# EAGLE board capacitor (EAGLE 9.6.2)
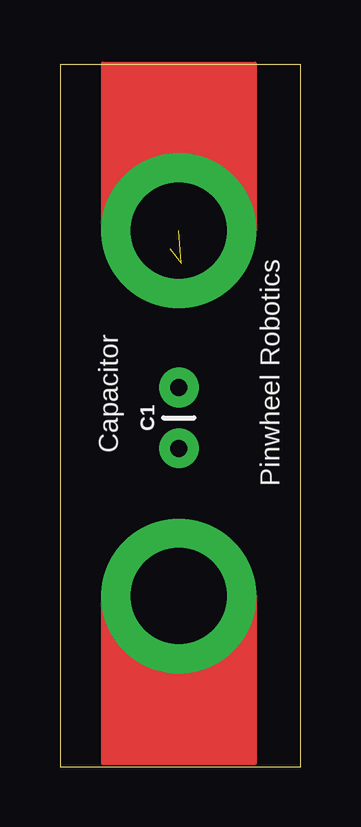
[diagram p0: board, top side]
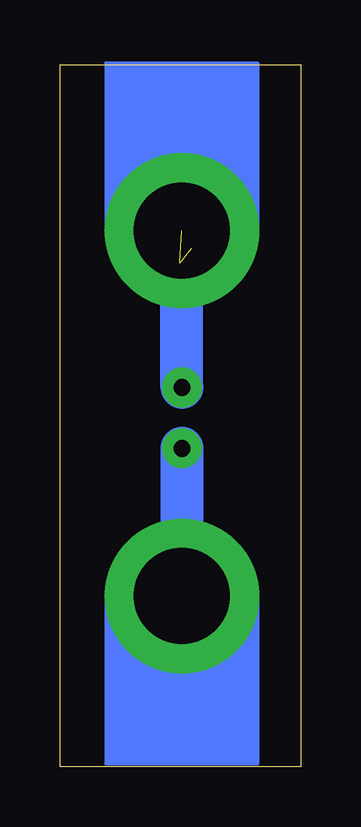
[diagram p1: board, bottom side, seen from below]

Size 10.03 x 29.27 mm. Coordinates in mm from the lower left corner, seen from the top.
Outline: 0,0 10.03,0 10.03,29.27 0,29.27 0,0
Copper layers (1*16): Top 0.035mm / dielectric 1.5mm / Bottom 0.035mm
Design rules "default": minimum track width 6mil, minimum drill 0.35mm, track to track 6mil, track to pad 6mil, pad to pad 6mil, via to via 6mil, smd to smd 6mil, copper to edge 40mil, drill to drill 6mil, minimum pad ring 10mil, minimum via ring 8mil, stop-mask expansion 4mil, vias tented up to drill 0mil, thermal gap 10mil

## Footprints (pad centres in the part's own frame; a part is rotated, then mirrored left to right if it is on the bottom)
CAP-PTH-2.54 = drill 0.7 pad 1.651: 1 -1.27,0; 2 1.27,0
MICROBIT_PAD = drill 4 pad 6.452: PAD 0,0

## Placement (x,y rotation side)
C1  22pF  [CAP-PTH-2.54]  4.95,14.54 90 top
U$1  MICROBIT_PAD  [MICROBIT_PAD]  4.95,22.35 180 top
U$2  MICROBIT_PAD  [MICROBIT_PAD]  4.95,7.11 0 top

## Library data of the parts
C1 = SparkFun-Capacitors; PROD_ID: CAP-09128
U$1 U$2 = microbit

## Nets
N$1: C1.1 U$2.PAD
N$2: C1.2 U$1.PAD

## Tracks (layer width: path | path; a pad name or v marks a point on that pad's centre or on a via)
N$1
  Bottom 0.152: 5.03,13.36 C1.1
  Bottom 1.8: C1.1 U$2.PAD
N$2  (2 unrouted)
  Bottom 0.152: 5.03,16.1 C1.2 | 5.03,20.98 5.05,21
  Bottom 1.8: C1.2 4.95,21.21 4.57,21.59

## Text on the board
tPlace: Capacitor | Pinwheel Robotics